# Altium PCB 2020-08-16_06-31-521.PcbDoc
Units mil, origin at the board's own origin, x right, y up, seen from the top; angles counter-clockwise.
Board outline 2200 x 1600 mil, 4 copper layers (Top Layer, MidLayer1, MidLayer2, Bottom Layer); 11 components, 10 nets, 28 pads, 8 vias.
Unrouted connection lines stored in the file: 6.
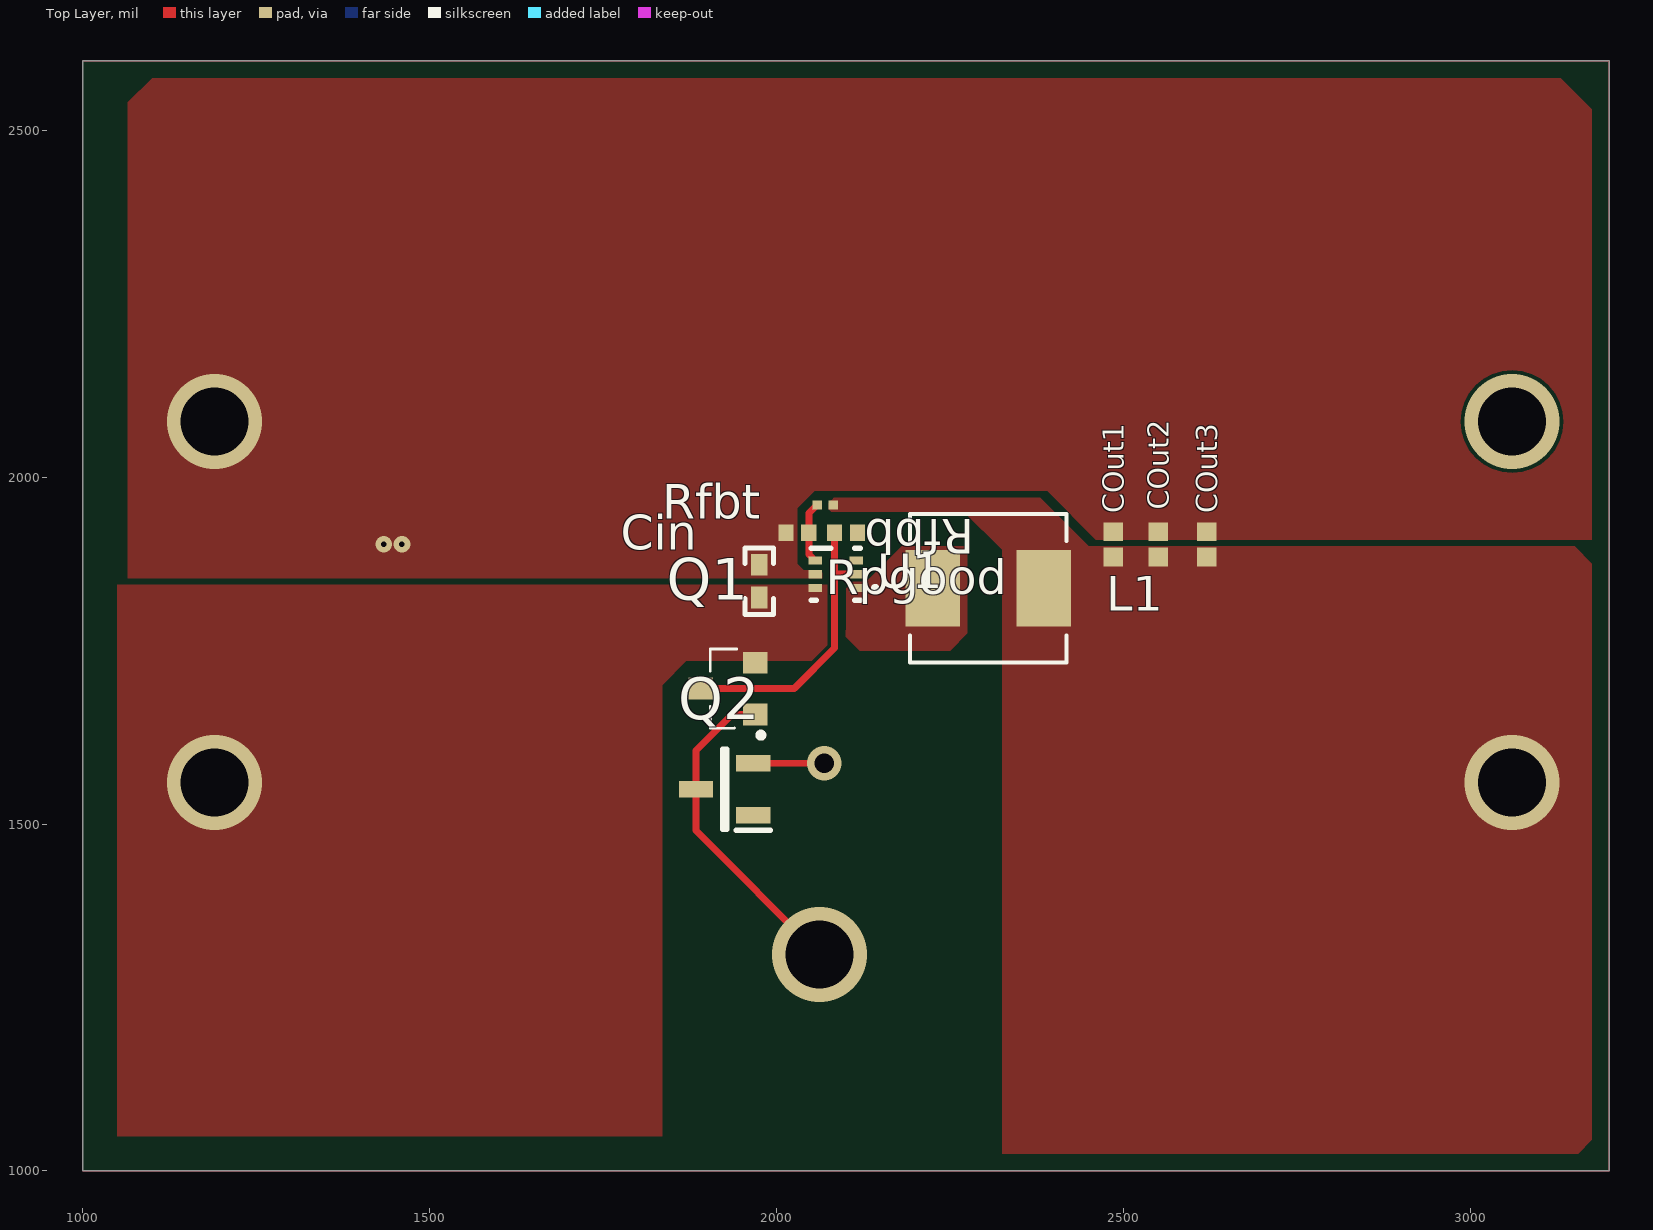
[diagram p0: Top Layer view]
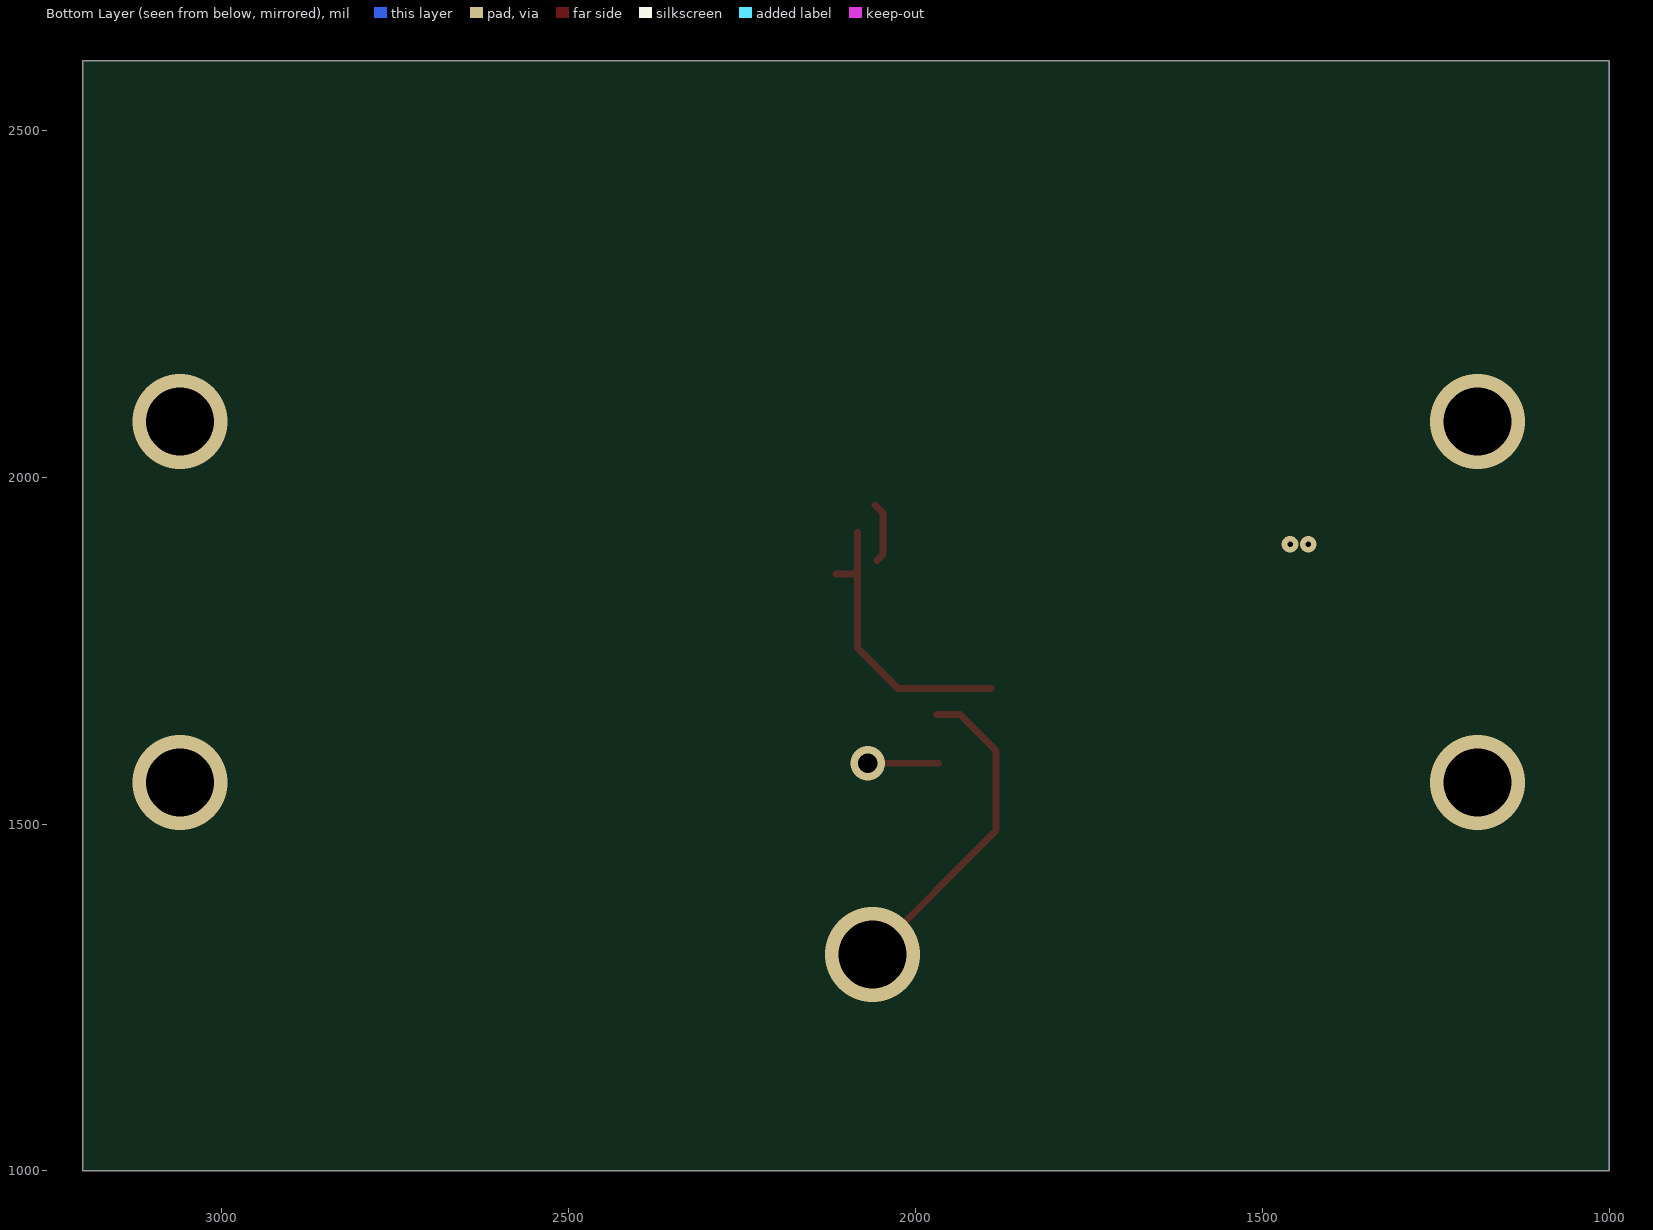
[diagram p1: Bottom Layer view, seen from below]

## Layer stack, top to bottom
Top Solder: solder mask 0.4, Solder Resist, Dk 3.5
Top Layer: signal copper 1.4
Dielectric1: core 12.6, FR-4, Dk 4.8
MidLayer1: signal copper 1.4
Dielectric2: prepreg 12.6, FR-4, Dk 4.8
MidLayer2: signal copper 1.4
Dielectric3: core 12.6, FR-4, Dk 4.8
Bottom Layer: signal copper 1.4
Bottom Solder: solder mask 0.4, Solder Resist, Dk 3.5

## Board outline
1000,1000 3200,1000 3200,2600 1000,2600

## Design rules (kind name [scope] priority, off if disabled: settings)
Clearance [All] p1: gap=5
PlaneConnect [All] p1: planeconnectstyle=Direct reliefexpansion=20 reliefentries=4 reliefconductorwidth=10 reliefairgap=10
PolygonConnect [All] p1: connectstyle=Direct reliefconductorwidth=10 reliefentries=4 polygonreliefangle="90 Angle" airgapwidth=10
RoomDefinition 2020-08-16_06-31-521 [InComponentClass('2020-08-16_06-31-521')] p1: confinementstyle=ConfineIn formatcopy=TRUE lockcomponents=FALSE outline 3245,2640 955,2640 955,955 3245,955
RoutingVias [All] p1: holewidth=28 width=50 viastyle="Through Hole" minholewidth=28 minwidth=50 maxholewidth=28 maxwidth=50
SolderMaskExpansion [All] p1: expansion=4
Width [All] p1: maxlimit=10 minlimit=10 preferedwidth=10
29 further rules are at their usual default settings.

## Components (designator, comment, footprint, x,y, rotation, side; value= is the part's Value field where it differs from the comment)
Cin "Comment" 0402_065 1975,1850 r90 top
COut1 "GRJ155R60J106ME11D" CAPC1005X70N 2485,1903.11 r90 top
COut2 "GRJ155R60J106ME11D" CAPC1005X70N 2550,1903.11 r90 top
COut3 "GRJ155R60J106ME11D" CAPC1005X70N 2620,1903.11 r90 top
L1 "Comment" IHLP-2020CZ 2305,1840 r0 top
Q1 "BC858CLT3G" BC858CLT3G 1930,1695 r90 top
Q2 "BC858BLT3G" SOT96P237X111-3N 1925,1550 r180 top
Rfbb "Comment" 0402 2030,1920 r180 top
Rfbt "Comment" 0201 2070,1960 r180 top
Rpgood "Comment" 0402 2100,1920 r180 top
U1 "Comment" DRL0006A 2085,1860 r0 top

## Footprints (in the part's own frame and the unit in brackets; to place one, negate y for a bottom-side part, rotate by r counter-clockwise, add the part's x,y. Pads: shape width x height; smd on the part's side, far side on the other; paste and mask are expansions set on the pad)
0201 [mil]
  rect 14x13 smd: 1(-11.5,0) 2(11.5,0)
0402 [mil]
  rect 22x24 smd: 1(-16.5,0) 2(16.5,0)
0402_065 [mm]
  rect 0.8x0.6 smd: 1(-0.6,0) 2(0.6,0)
  silkscreen extent -1.22,-0.52 1.22,0.52
BC858CLT3G [mm]
  rect 0.8x0.9 smd: 1(-0.95,-1) 2(0.95,-1) 3(0.01,1)
  silkscreen extent -1.8,-1.3 1.45,0.65
CAPC1005X70N [mm]
  rect 0.69x0.72 smd: 1(-0.46,0) 2(0.46,0)
  body extent -0.5,-0.25 0.5,0.25, height 0.7
DRL0006A [mm]
  rect 0.5x0.3 smd: 1(-0.75,0.5) 2(-0.75,0) 3(-0.75,-0.5) 4(0.75,-0.5) 5(0.75,0) 6(0.75,0.5)
  silkscreen extent -0.9,-0.95 0.9,0.95
IHLP-2020CZ [mil]
  rect 78x110 smd: 1(-80,0) 2(80,0)
  silkscreen extent -166,-107 113,107
SOT96P237X111-3N [mm]
  rect 1.25x0.6 smd: 1(-1.05,0.955) 2(-1.05,-0.955) 3(1.05,0)
  silkscreen extent -1.68,-1.46 0.08,1.51, body extent -1.18,-1.46 1.18,1.46, height 1.11

## Part data
Cin: library part GRM155R61A475MEAAD, "GRM155R61A475MEA"
COut1 COut2 COut3: "Capacitor"
L1: library part IHLP2020CZER2R2M11, "Unknown"
Q1 Q2: "Transistor BJT PNP"
Rfbb: library part CRCW0402100KFKED, "CRCW0402100KFKED"
Rfbt: library part RC0201FR-07442KL, "RC0201FR-07442KL"
Rpgood: library part CRCW0402475KFKED, "CRCW0402475KFKED"
U1: library part TLV62569PDRLR, "TLV62569PDRLR"

## Via types
v1: diameter 137/137/137/137 (per signal layer), hole 98, Top Layer to Bottom Layer, 5 vias
v2: diameter 24/24/24/24 (per signal layer), hole 8, Top Layer to Bottom Layer, 2 vias
v3: diameter 50, hole 28, Top Layer to Bottom Layer, 1 vias

## Nets (pads, with @x,y where several pads share a name; then routed paths per layer and width w, separated by ;. In a path a pad name is that pad's centre, name@x,y a point inside that pad or via, vN(x,y) a via of type N, cw(c..) or ccw(c..) an arc to the next point about the centre after c; other vN are vias at no path point)
0: Cin.2 COut1.2 COut2.2 COut3.2 Q2.2 Rfbb.2 U1.2
  other v1: 1190,2080
  other v2: 1434,1903 1460,1903
CTRL: 
  other v1: 2062,1312
NetCOut1_1: COut1.1 COut2.1 COut3.1 L1.2 Rfbt.1
  other v1: 3060,1560
NetL1_1: L1.1 U1.4
NetQ1_1: Q1.1 Q2.3
NetQ1_3: Q1.3 Rpgood.2 U1.5 | length 383.4
  Top Layer w10: Q1.3 2025.39,1695.39 2083.5,1753.5 Rpgood.2
NetQ2_1: Q2.1
NetRfbb_1: Rfbb.1 Rfbt.2 U1.1
NetRpgood_1: Rpgood.1 U1.6
VIN: Cin.1 Q1.2 U1.3
  other v1: 1190,1560
copper on no net: | length 697.9
  Top Layer w10: 1966.34,1587.6 v3(2068.6,1587.6) ; 1969.77,1658 1969.37,1657.6 1935.6,1657.6 1883.66,1605.66 1883.66,1550 1883.66,1490.34 2062,1312 ; 2055.47,1879.69 2046.5,1888.66 2046.5,1920 2046.5,1948.5 2058,1960 2058.5,1960 ; 2083.5,1860 2114.53,1860
  other v1: 3060,2080

## Polygon pours and split planes (outlines as drawn)
NetCOut1_1 on Top Layer "Top Layer-No Net" (solid, pour order 19): 2075,1950 2270,1950 2325,1895 2325,1845 2325,1025 3155,1025 3175,1045 3175,1875 3150,1900 2450,1900 2405,1945 2380,1970 2075,1970
NetL1_1 on Top Layer "Top Layer-No Net" (solid, pour order 17): 2105,1845 2100,1840 2100,1790 2100,1770 2120,1750 2250,1750 2275,1775 2275,1900 2180,1900 2130,1850 2110,1850
0 on Top Layer "Top Layer-No Net" (solid, pour order 15): 2066,1854 1065,1854 1065,2540 1100,2575 2000,2575 2040,2575 3130,2575 3175,2530 3175,1910 2460,1910 2390,1980 2055,1980 2030,1955 2030,1875 2039,1866 2066,1866
VIN on Top Layer "Top Layer-No Net" (solid, pour order 13): 2075,1845 2075,1735 1870,1735 1835,1700 1835,1050 1050,1050 1050,1845

## Other copper
Multi-Layer:
  the board outline again, w1

## Silkscreen, mask and mechanical layers (free items; w line width, h text height)
Top Overlay: